# Altium PCB PCB.PcbDoc (part 2 of 2)
Units mm, origin at the board's own origin, x right, y up, seen from the top; angles counter-clockwise.
Board outline 100.5 x 40.52 mm, 2 copper layers (Top Layer, Bottom Layer); 44 components, 39 nets, 211 pads, 76 vias.
Unrouted connection lines stored in the file: 2.
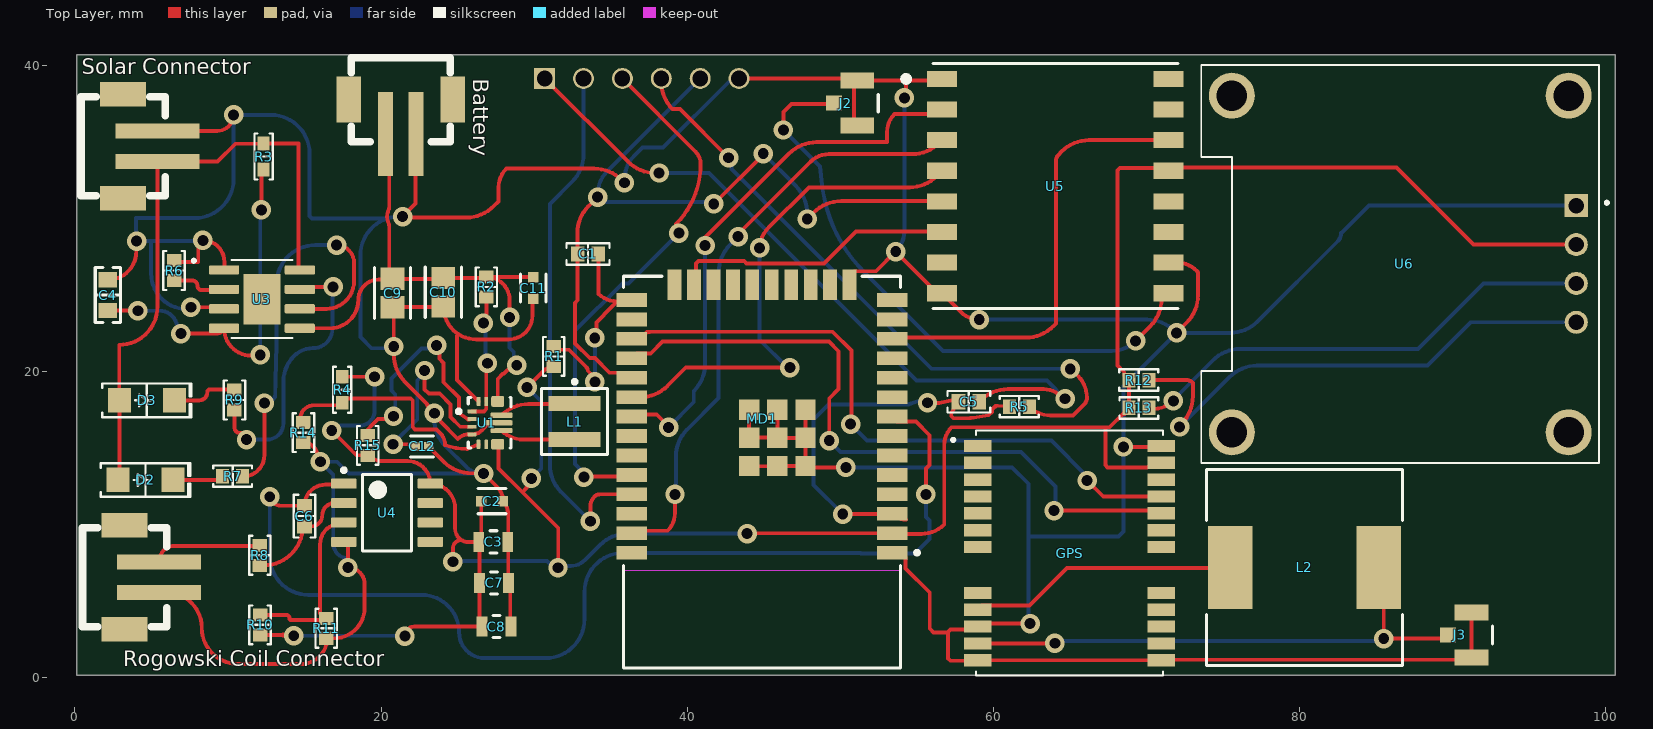
[diagram p0: Top Layer view]

## Via types
v1: diameter 1.27, hole 0.711, Top Layer to Bottom Layer, 76 vias

## Nets (pads, with @x,y where several pads share a name; then routed paths per layer and width w, separated by ;. In a path a pad name is that pad's centre, name@x,y a point inside that pad or via, vN(x,y) a via of type N, cw(c..) or ccw(c..) an arc to the next point about the centre after c; other vN are vias at no path point) (continued)
NetR10_2: (continued)
  Top Layer w0.254: R10.2 13.797,4.091 cw(c13.797,3.869) 14.019,3.869 ccw(c14.126,3.869) 14.126,3.762 R11.2@16.57,3.762 ; R11.2 cw(c16.421,4.269) 16.019,4.269 16.019,8.715 cw(c17.359,8.715) 17.359,10.055 U4.3@17.534,10.055
NetR15_2: R15.2 U1.2 | length 14.9
  Top Layer w0.254: R15.2 19.13,15.862 19.13,16.219 19.383,16.471 19.798,16.887 20.629,16.887 v1(20.814,17.072) ; v1(23.627,21.702) 23.822,21.507 23.822,20.825 24.088,20.559 24.088,19.293 25.095,18.286 25.095,17.269 25.688,16.859 25.79,16.859 U1.2
  Bottom Layer w0.254: v1(20.814,17.072) 20.931,17.189 20.931,18.504 20.678,18.757 20.678,19.544 22.642,21.507 23.433,21.507 v1(23.627,21.702)
PG: C2.1 C3.2 C7.2 C8.2 GPS.23 MD1.2 R1.2 R4.2 R10.1 R12.1 R13.1 R15.1 U1.7-8 U4.8 U5.13 U6.2 | length 172.8
  Top Layer w0.254: R10.1 13.592,2.791 13.592,2.802 ccw(c13.667,2.802) 13.667,2.727 v1(14.297,2.727) ; v1(16.778,16.138) 18.396,14.52 R15.1@19.092,14.52 ; R4.2 19.463,19.652 19.463,19.637 19.584,19.637 v1(19.584,19.65) ; R15.1@19.092,14.572 ccw(c20.137,15.617) 20.137,14.139 21.644,14.139 21.737,14.148 cw(c21.715,12.637) U4.8@23.225,12.671 ; v1(21.555,2.706) cw(c22.174,2.706) 22.174,3.325 C8.2@26.56,3.325 ; U4.8 cw(c23.22,11.053) U4.8@23.225,12.671 ; v1(24.692,7.568) 24.692,8.424 cw(c25.243,8.424) 25.243,8.975 ; C3.2@26.403,8.864 ccw(c26.403,9.007) 26.546,9.007 C2.1 ; C7.2@26.425,6.184 C3.2@26.425,8.823 ; C7.2 26.433,3.493 ccw(c26.56,3.493) C8.2@26.56,3.365 ; C3.2@26.478,8.846 25.725,8.846 cw(c25.725,9.733) 24.838,9.733 24.838,11.053 ccw(c23.22,11.053) U4.8@23.225,12.671 ; U1.7-8@27.591,15.248 27.678,15.161 27.678,13.665 29.235,12.108 ; v1(29.542,18.951) 30.647,20.057 cw(c31.253,19.451) R1.2@31.253,20.307 ; v1(29.821,13.009) 29.821,12.734 29.514,12.427 29.514,12.387 29.235,12.108 ; v1@31.575,7.187 31.575,9.768 29.235,12.108 ; v1@43.863,9.44 ccw(c43.89,9.468) 43.89,9.429 MD1.2 ; MD1.2@53.392,9.385 55.307,9.385 ccw(c55.307,11.486) 56.792,10.001 56.792,15.187 cw(c58.445,15.187) 57.276,16.355 66.379,16.355 67.32,16.355 ; R13.1@68.565,17.22 R13.1@68.467,17.22 ; R13.1@68.856,17.582 R12.1 68.558,19.735 68.558,19.947 68.112,20.393 68.112,33.133 68.261,33.282 71.28,33.282 U5.13 71.657,33.311 86.345,33.311 91.367,28.288 97.989,28.288 U6.2@98.041,28.236 ; R13.1 R13.1@68.467,17.22 ; GPS.23 70.707,13.757 70.088,13.757 70.058,13.727 67.469,13.727 67.32,13.876 67.32,16.355 ; 67.32,16.355 67.602,16.355 R13.1@68.467,17.22
  Bottom Layer w0.254: v1(14.297,2.727) 21.427,2.727 21.427,2.706 v1(21.555,2.706) ; v1@16.821,16.195 cw(c17.507,15.508) 17.507,16.479 18.59,16.479 18.59,16.452 ccw(c18.59,17.447) 19.584,17.447 v1(19.584,19.65) ; v1(24.692,7.568) 24.73,7.606 30.852,7.606 31.286,7.172 v1(31.561,7.172) ; v1(29.542,18.951) 30.467,18.026 30.467,13.655 v1(29.821,13.009) ; v1@31.508,7.291 32.378,7.291 ccw(c32.378,8.636) 33.33,7.685 34.309,8.664 cw(c36.105,6.868) 36.105,9.408 v1(43.917,9.408)
RST: MD1.23 U5.6 | length 18.4
  Top Layer w0.254: MD1.23 40.579,25.801 40.579,27.062 40.728,27.211 43.726,27.211 43.888,27.05 48.936,27.05 51.018,29.131 56.509,29.131 U5.6@56.563,29.077
RX: J1.02 MD1.35 | length 34.8
  Top Layer w0.254: v1(33.681,10.208) 33.681,11.173 cw(c34.6,11.173) 33.95,11.823 cw(c34.321,11.451) 34.321,11.977 MD1.35@36.295,11.977
  Bottom Layer w0.254: J1.02 33.23,34.186 cw(c30.69,34.186) 32.486,32.39 31.028,30.932 31.028,13.913 ccw(c33.568,13.913) 31.772,12.117 v1(33.681,10.208)
SCK: MD1.30 U5.4 | length 34.1
  Top Layer w0.254: MD1.30@36.269,18.318 36.929,18.318 ccw(c36.929,20.858) 38.725,19.062 39.91,20.247 v1(46.709,20.247) ; v1(44.731,28.066) cw(c46.733,27.971) 45.316,29.389 47.947,32.02 54.514,32.02 ccw(c54.514,34.56) 56.31,32.764 U5.4
  Bottom Layer w0.254: v1(44.731,28.066) 44.729,28.064 44.729,22.069 46.551,20.247 v1(46.709,20.247)
SCL: R13.2 U6.3 | length 31.1
  Top Layer w0.254: R13.2@70.164,17.563 70.522,17.563 ccw(c70.522,19.324) v1(71.767,18.079)
  Bottom Layer w0.254: v1(71.767,18.079) cw(c71.945,18.079) 71.819,18.205 74.337,20.723 cw(c76.133,18.927) 76.133,21.467 87.754,21.467 92.035,25.748 97.967,25.748 U6.3@97.992,25.774
SDA: R12.2 U6.4 | length 34.5
  Top Layer w0.254: R12.2 72.604,19.437 cw(c72.604,18.824) 73.038,19.257 73.038,18.376 cw(c70.498,18.376) 72.294,16.58 v1@72.153,16.439
  Bottom Layer w0.254: v1(72.175,16.371) 75.443,19.639 cw(c77.239,17.843) 77.239,20.383 88.354,20.383 91.18,23.208 97.935,23.208 U6.4@97.974,23.247
Stdby: R7.1 U3.6 | length 26.8
  Top Layer w0.254: R7.1@10.998,13.138 ccw(c10.998,14.516) 12.376,14.516 v1(12.376,17.928) ; U3.6 16.435,24.09 ccw(c16.435,25.89) 18.056,25.107 ccw(c17.827,25.217) 18.072,25.15 cw(c19.848,24.671) 18.171,25.425 ccw(c17.939,25.528) 18.185,25.468 ccw(c16.435,25.89) 18.235,25.89 18.235,27.108 ccw(c17.098,27.108) 17.098,28.245 v1(17.098,28.256)
  Bottom Layer w0.254: v1(12.376,17.928) ccw(c12.376,18.733) 13.047,18.288 ccw(c12.834,18.428) 13.088,18.42 13.116,19.423 13.18,21.735 ccw(c12.927,21.742) 13.181,21.742 13.181,25.716 cw(c15.721,25.716) 15.721,28.256 v1(17.098,28.256)
TX: J1.03 MD1.34 | length 34.7
  Top Layer w0.254: v1(33.251,13.093) cw(c33.342,13.001) 33.342,13.131 MD1.34@36.129,13.131 ; J1.03 40.53,34.379 cw(c39.69,33.539) 40.878,33.539 cw(c35.276,33.539) 39.282,29.622 39.282,29.52 39.282,29.47 v1(39.461,29.036)
  Bottom Layer w0.254: v1(33.251,13.093) 33.251,13.368 32.677,13.941 32.677,22.666 35.765,25.754 36.179,25.754 v1(39.461,29.036)
pads on no net: "Rogowski Coil Connector.3" "Rogowski Coil Connector.4" "Solar Connector.3" "Solar Connector.4" "Solar Connector." Battery.3 Battery.4 GPS.1 GPS.2 GPS.3 GPS.4 GPS.5 GPS.6 GPS.7 GPS.8 GPS.14 GPS.15 GPS.16 GPS.17 GPS.18 GPS.19 GPS.22 MD1.4 MD1.5 MD1.6 MD1.7 MD1.9 MD1.10 MD1.11 MD1.13 MD1.14 MD1.16 MD1.17 MD1.18 MD1.19 MD1.20 MD1.21 MD1.22 MD1.24 MD1.26 MD1.32 MD1.33 MD1.36 U1.6 U3.9 U4.5 U4.6 U4.7 U5.7 U5.11 U5.12 U5.15 U5.16 U6.S1 U6.S2 U6.S3 U6.S4
copper on no net: | length 0.1
  Bottom Layer w0.254: 22.846,26.119 cw(c22.846,26.078) 22.887,26.078

## Silkscreen, mask and mechanical layers (free items; w line width, h text height)
Mechanical 1:
  lines w0.254: -0.018,0.032 100.753,0.032 100.753,40.796 ccw(c100.736,40.796) 100.748,40.809 0.101,40.809 ; 0,0 0,40.767 ; 0.56,38.767 cw(c0.661,38.666) 0.661,38.808